# Altium PCB LittleRC.PcbDoc
Units mil, origin at the board's own origin, x right, y up, seen from the top; angles counter-clockwise.
Board outline 1496.06 x 1811.02 mil, 2 copper layers (Top Layer, Bottom Layer); 39 components, 41 nets, 169 pads, 190 vias.
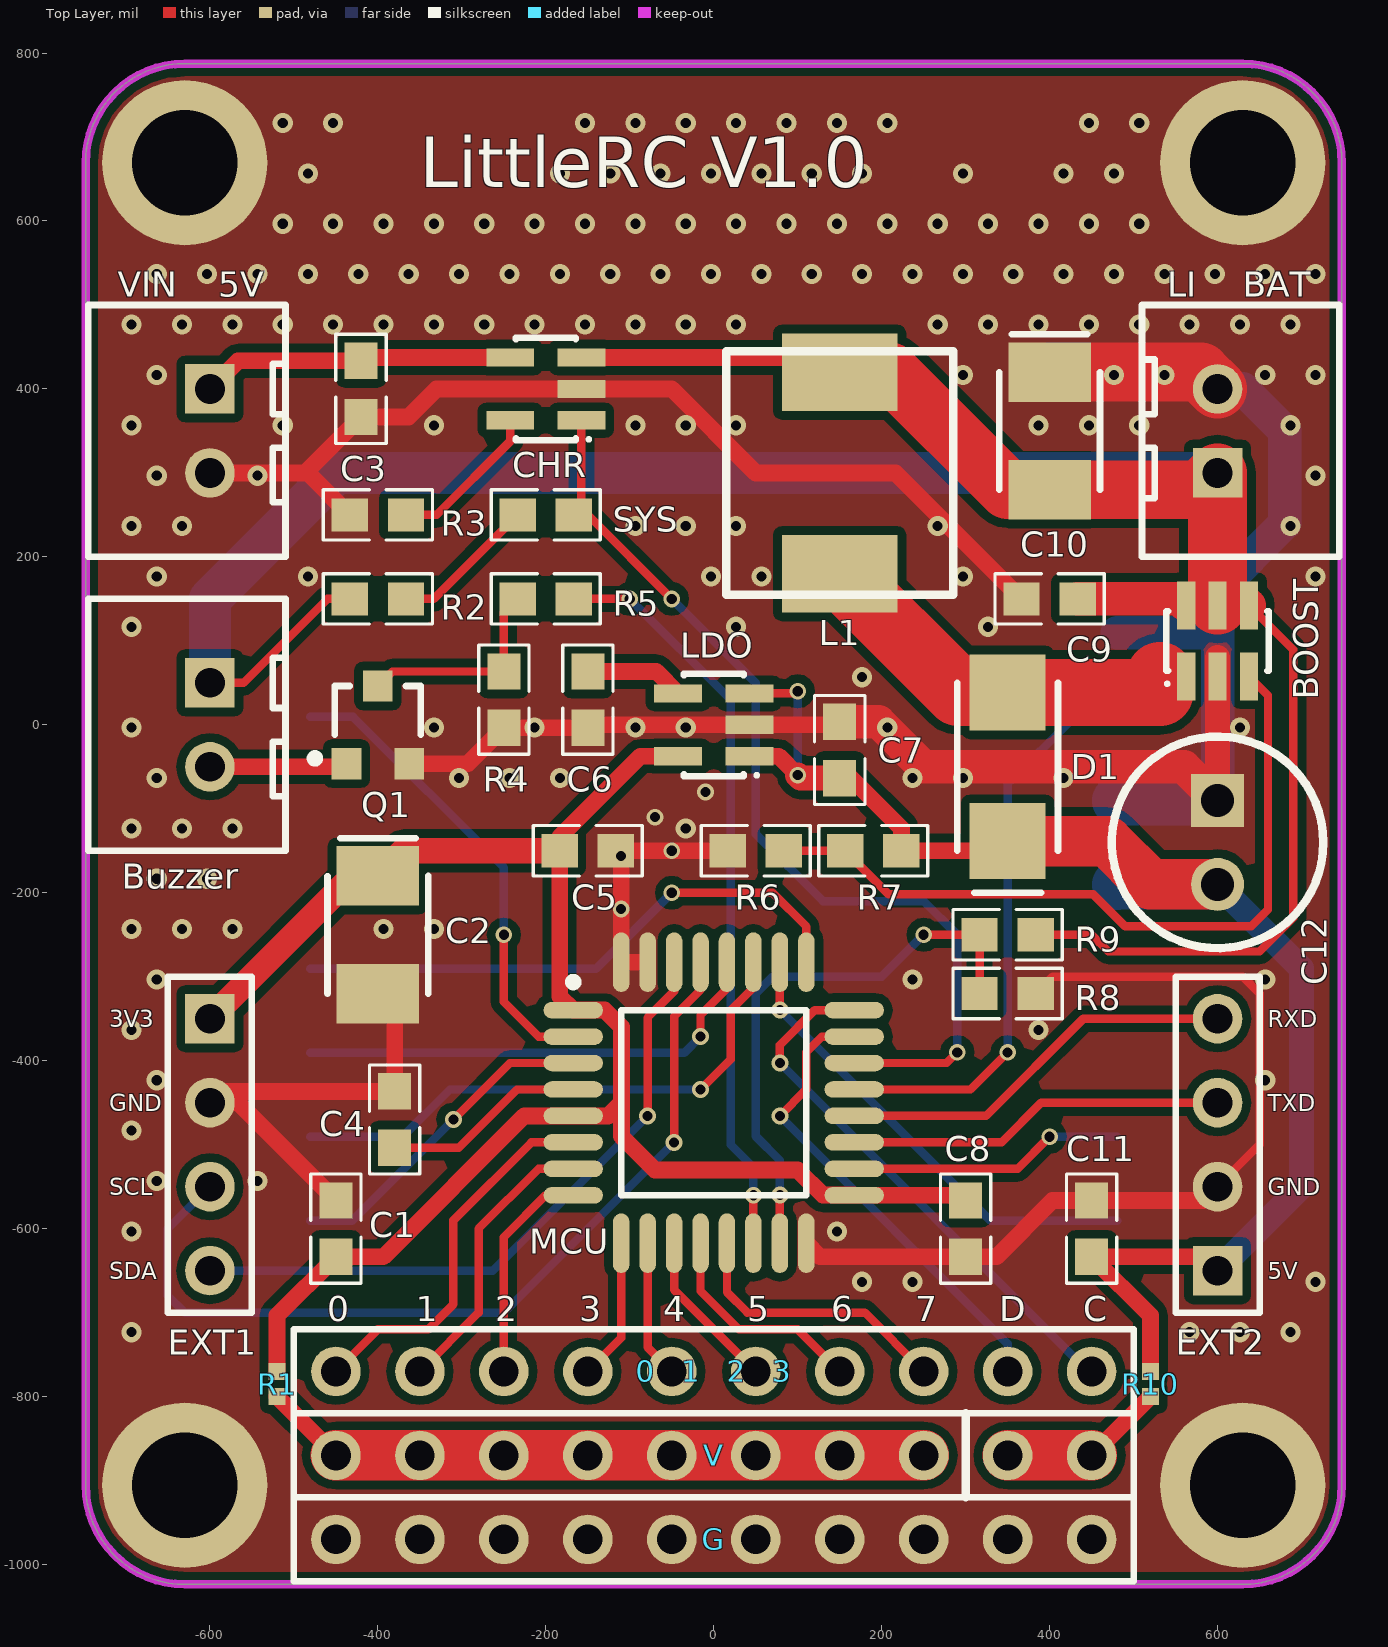
[diagram p0: Top Layer view]
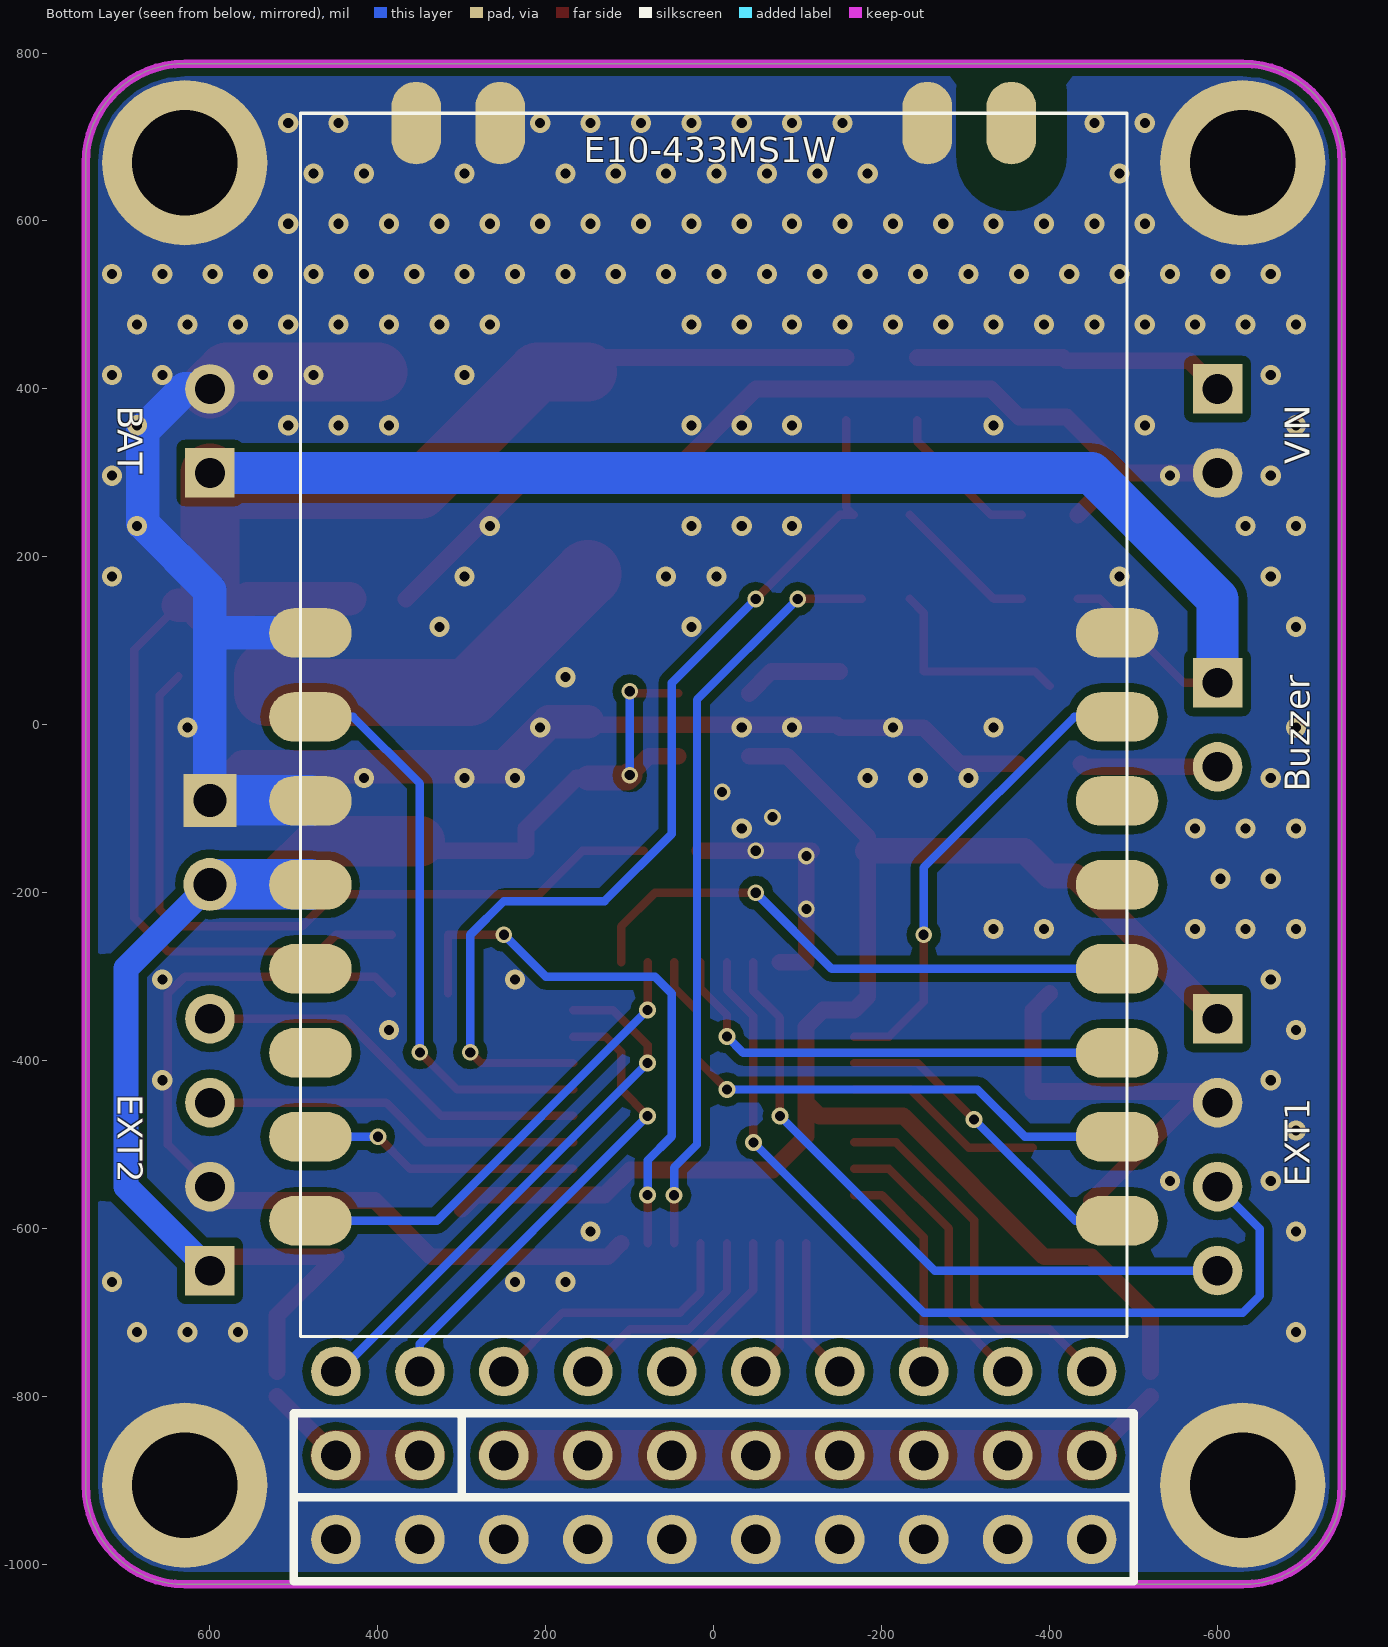
[diagram p1: Bottom Layer view, seen from below]

## Layer stack, top to bottom
Top Solder: solder mask 0.4, Solder Resist, Dk 3.5
Top Layer: signal copper 1.4
Dielectric1: dielectric 12.6, FR-4, Dk 4.8
Bottom Layer: signal copper 1.4
Bottom Solder: solder mask 0.4, Solder Resist, Dk 3.5

## Board outline
-748.03,-905.51 ccw(c-629.92,-905.51) -629.92,-1023.62 629.92,-1023.62 ccw(c629.92,-905.51) 748.03,-905.51 748.03,669.29 ccw(c629.92,669.29) 629.92,787.4 -629.92,787.4 ccw(c-629.92,669.29) -748.03,669.29

## Design rules (kind name [scope] priority, off if disabled: settings)
Clearance [All] p1: gap=10 ignorepadtopadclearanceinfootprint=FALSE
ComponentClearance [All] p1: gap=0 collisioncheckmode=3 verticalgap=0 showdistances=FALSE
PlaneConnect [All] p1: planeconnectstyle=Direct reliefexpansion=20 reliefentries=4 reliefconductorwidth=10 reliefairgap=10
PolygonConnect [All] p1: connectstyle=Direct reliefconductorwidth=100 reliefentries=4 polygonreliefangle="90 Angle" airgapwidth=10
RoutingVias [All] p1: holewidth=28 width=50 viastyle="Through Hole" minholewidth=12 minwidth=20 maxholewidth=28 maxwidth=50
SolderMaskExpansion [All] p1: expansion=4
Width [All] p1: maxlimit=100 minlimit=10 preferedwidth=10 minimp=50.000000 maximp=50.000000 favimp=50.000000
28 further rules are at their usual default settings.

## Components (designator, comment, footprint, x,y, rotation, side; value= is the part's Value field where it differs from the comment)
"0   1   2   3" "Header 10" HDR1X10 -450,-770 r0 top (schematic designator IO)
BAT "Battery" HDR2X1_B1 600,400 r270 top
BOOST "SX1308" SOT23-6 600,100 r0 top
Buzzer "Header 2" HDR2X1_B1 -600,-50 r90 top
C1 "Cap" 0603-1 -450,-600 r90 top value=0.1uf (schematic designator C33)
C2 "Cap" CAP-3528 -400,-250 r270 top value=0.1uf (schematic designator C345)
C3 "Cap" 0603-1 -420,400 r90 top value=10uF (schematic designator C8)
C4 "Cap" 0603-1 -380,-470 r90 top value=0.1uf (schematic designator C1)
C5 "Cap" 0603-1 -150,-150 r180 top value=0.1uf (schematic designator C2)
C6 "Cap" 0603-1 -150,30 r90 top value=103 (schematic designator C3)
C7 "Cap" 0603-1 150,-30 r270 top value=10uF (schematic designator C6)
C8 "Cap" 0603-1 300,-600 r90 top value=104 (schematic designator C4)
C9 "Cap" 0603-1 400,150 r0 top value=10uF (schematic designator C91)
C10 "Cap" CAP-3528 400,350 r270 top value=10uF (schematic designator C123)
C11 "Cap" 0603-1 450,-600 r90 top value=0.1uf (schematic designator C34)
C12 "Cap" RB.1/.2-F 600,-140 r90 top value=10uF (schematic designator C9)
CHR "LTC4054" SOT23-5 -200,400 r90 top
D1 "D-Schottky" DIODE-SMA 350,-50 r270 top
E10-433MS1W "SPI-E10433MS1W" SPI-E10433MS1W 0,0 r90 bottom locked
EXT1 "Header 4" HDR1X4 -600,-350 r270 top
EXT2 "Header 4" HDR1X4 600,-650 r90 top
G "Header 10" HDR1X10 -450,-970 r0 top (schematic designator GND)
L1 "Inductor" 0630 150,300 r270 top value=10uH
LDO "SPX3819" SOT23-5 0,0 r90 top
MCU "STM32F030K6Tx" LQFP-32 0,-450 r0 top
Q1 "S8050" SOT-23 -400,0 r0 top
R1 "Res1" jumper -520,-785 r90 top value=0 (schematic designator R3V3)
R2 "Res1" 0603-1 -400,150 r0 top value=1K
R3 "Res1" 0603-1 -400,250 r180 top value=1K2 (schematic designator R22)
R4 "Res1" 0603-1 -250,30 r270 top value=1K
R5 "Res1" 0603-1 -200,150 r0 top value=1K (schematic designator R3)
R6 "Res1" 0603-1 50,-150 r0 top value=10K (schematic designator R12)
R7 "Res1" 0603-1 190,-150 r0 top value=10K (schematic designator R11)
R8 "Res1" 0603-1 350,-320 r0 top value=10K (schematic designator R7)
R9 "Res1" 0603-1 350,-250 r180 top value=10K (schematic designator R5)
R10 "Res1" jumper 520,-785 r90 top value=0 (schematic designator R5V)
SYS "LED0" 0603-1 -200,250 r0 top
V "Header 10" HDR1X10 -450,-870 r0 top (schematic designator VCC)
VIN "Header 2" HDR2X1_B1 -600,300 r90 top

## Footprints (in the part's own frame and the unit in brackets; to place one, negate y for a bottom-side part, rotate by r counter-clockwise, add the part's x,y. Pads: shape width x height; smd on the part's side, far side on the other; paste and mask are expansions set on the pad)
0603-1 [mm] "贴片带丝印"
  rect 1.1x1 smd: 1(-0.85,0) 2(0.85,0)
  silkscreen extent -1.65,-0.76 1.65,0.76, body extent -1.14,-0.38 1.14,0.38, height 1
0630 [mm]
  rect 2.35x3.5 smd: 1(-3.048,0) 2(3.048,0)
  silkscreen extent -3.68,-3.43 3.68,3.43
CAP-3528 [mm] "钽电容"
  rect 1.8x2.5 smd: 1(-1.778,0) 2(1.778,0)
  silkscreen extent -2.92,-1.52 1.78,1.52, body extent -1.91,-1.4 1.91,1.4, height 1.1
DIODE-SMA [mm] "贴片二极管"
  rect 2.3x2.3 smd: 1(-2.25,0) 2(2.25,0)
  silkscreen extent -2.54,-1.52 3.81,1.52, body extent -2.92,-1.4 2.92,1.4, height 3
HDR1X4 [mm] "Connector; Header; 4 Position"
  rect 1.5x1.5 hole 0.9: 1(0,0)
  round 1.5 hole 0.9: 2(2.54,0) 3(5.08,0) 4(7.62,0)
  silkscreen extent -1.27,-1.27 8.89,1.27
HDR1X10 [mm] "Connector; Header; 10 Position"
  round 1.5 hole 0.9: 1(0,0) 2(2.54,0) 3(5.08,0) 4(7.62,0) 5(10.16,0) 6(12.7,0) 7(15.24,0) 8(17.78,0) 9(20.32,0) 10(22.86,0)
  silkscreen extent -1.27,-1.27 24.13,1.27
HDR2X1_B1 [mm] "Connector; Header; 4 Position"
  round 1.5 hole 0.9: 1(0,0)
  rect 1.5x1.5 hole 0.9: 2(2.54,0)
  silkscreen extent -2.54,-2.29 5.08,3.68, body extent -2.41,-2.16 5.08,3.56, height 1.5
jumper [mil]
  rect 20x20 smd: 1(-15,0) 2(15,0)
LQFP-32 [mm] "LQFP"
  oval 1.8x0.5 smd: 1(-4.25,2.8) 2(-4.25,2) 3(-4.25,1.2) 4(-4.25,0.4) 5(-4.25,-0.4) 6(-4.25,-1.2) 7(-4.25,-2) 8(-4.25,-2.8) 17(4.25,-2.8) 18(4.25,-2) 19(4.25,-1.2) 20(4.25,-0.4) 21(4.25,0.4) 22(4.25,1.2) 23(4.25,2) 24(4.25,2.8)
  oval 0.5x1.8 smd: 9(-2.8,-4.25) 10(-2,-4.25) 11(-1.2,-4.25) 12(-0.4,-4.25) 13(0.4,-4.25) 14(1.2,-4.25) 15(2,-4.25) 16(2.8,-4.25) 25(2.8,4.25) 26(2,4.25) 27(1.2,4.25) 28(0.4,4.25) 29(-0.4,4.25) 30(-1.2,4.25) 31(-2,4.25) 32(-2.8,4.25)
  silkscreen extent -4.37,-2.79 2.79,3.77, body extent -3.5,-3.5 3.5,3.5, height 1.6
RB.1/.2-F [mm]
  rect 1.6x1.6 hole 1: 1(1.27,0)
  round 1.6 hole 1: 2(-1.27,0)
  silkscreen extent -3.2,-3.2 3.2,3.2
SOT23-5 [mm] "SOT-23/SC-74A; 5 Leads; Body 3.1 x 3 mm, inc. leads (LxW max)"
  rect 0.55x1.45 smd: 1(-0.95,-1.075) 2(0,-1.075) 3(0.95,-1.075) 4(0.95,1.075) 5(-0.95,1.075)
  silkscreen extent -1.57,-1.35 1.55,0.9
SOT23-6 [mm] "SOT-23/SC-74A; 5 Leads; Body 3.1 x 3 mm, inc. leads (LxW max)"
  rect 0.55x1.45 smd: 1(-0.95,-1.075) 2(0,-1.075) 3(0.95,-1.075) 4(0.95,1.075) 5(0,1.075) 6(-0.95,1.075)
  silkscreen extent -1.57,-1.35 1.55,0.9
SOT-23 [mm]
  rect 0.9x0.95 smd: 1(-0.95,-1.175) 2(0.95,-1.175) 3(0,1.175)
  silkscreen extent -2.03,-1.14 1.3,1.18
SPI-E10433MS1W [mm]
  oval 1.5x2.5 smd: 1(2.78,-12.2) 2(0.24,-12.2) 3(-2.3,-12.2) 4(-4.84,-12.2) 5(-7.38,-12.2) 6(-9.92,-12.2) 7(-12.46,-12.2) 8(-15,-12.2) 9(-15,12.2) 10(-12.46,12.2) 11(-9.92,12.2) 12(-7.38,12.2) 13(-4.84,12.2) 14(-2.3,12.2) 15(0.24,12.2) 16(2.78,12.2)
  oval 2.5x1.5 smd: 17(18.2,9) 18(18.2,6.46) 19(18.2,-6.46) 20(18.2,-9)
  silkscreen extent -18.5,-12.5 18.5,12.5

## Part data
"0   1   2   3" G V: "Header, 10-Pin", LatestRevisionDate=17-Jul-2002, LatestRevisionNote="Re-released for DXP Platform.", Publisher="Altium Limited"
BAT: "Multicell Battery", LatestRevisionDate=17-Jul-2002, LatestRevisionNote="Re-released for DXP Platform.", PackageDescription="Battery; 2 Leads", PackageReference=BAT-2, Published=24-Mar-1999, Publisher="Altium Limited"
Buzzer VIN: "接插件", LatestRevisionDate=17-Jul-2002, LatestRevisionNote="Re-released for DXP Platform.", Publisher="Altium Limited"
C1 C2 C3 C4 C5 C6 C7 C8 C9 C10 C11 C12: "Capacitor", LatestRevisionDate=17-Jul-2002, LatestRevisionNote="Re-released for DXP Platform.", PackageDescription="Radial Cap, Thru-Hole; 2 Leads; 0.3 in Pin Spacing", PackageReference=RAD-0.3, Published=8-Jun-2000, Publisher="Altium Limited"
D1: "肖特基二极管", Code_JEDEC=DO-214-AA, LatestRevisionDate=17-Jul-2002, LatestRevisionNote="Re-released for DXP Platform.", PackageReference=SMB, Published=8-Jun-2000, Publisher="Altium Limited", Type=SS14
EXT1 EXT2: "Header, 4-Pin", LatestRevisionDate=17-Jul-2002, LatestRevisionNote="Re-released for DXP Platform.", Publisher="Altium Limited"
L1: "电感", Code_IEC=1005, Code_JEITA=0402, LatestRevisionDate=17-Jul-2002, LatestRevisionNote="Re-released for DXP Platform.", PackageReference=0402-A, Published=8-Jun-2000, Publisher="Altium Limited"
Q1: "NPN三极管", PackageDocument=Sep-1998, Code_JEDEC=TO-92A, ComponentLink1Description="Manufacturer Link", ComponentLink1URL=http://www.fairchildsemi.com/, ComponentLink2Description=Datasheet, ComponentLink2URL=http://www.fairchildsemi.com/ds/2N%2F2N3904.pdf, DatasheetDocument=1997, LatestRevisionDate=15-Jan-2003, LatestRevisionNote="PCB Footprint 'BCY-W3/D4.7' replaced", PackageReference=TO-92A, Published=8-Jun-2000, Publisher="Altium Limited"
R1 R2 R3 R4 R5 R6 R7 R8 R9 R10: "Resistor", LatestRevisionDate=17-Jul-2002, LatestRevisionNote="Re-released for DXP Platform.", PackageDescription="Axial Device, Thru-Hole; 2 Leads; 0.3 in Pin Spacing", PackageReference=AXIAL-0.3, Published=8-Jun-2000, Publisher="Altium Limited"
SYS: "Typical INFRARED GaAs LED", LatestRevisionDate=08-Jul-2005, LatestRevisionNote="Mech Layer 1 removed.", PackageDescription="LED; 2 Leads", PackageReference=LED-0, Published=8-Jun-2000, Publisher="Altium Limited"

## Free pads (board coordinates)
  round 196.85 hole 125.98: 1(-629.92,669.29) 2(-629.92,-905.51) 3(629.92,-905.51) 4(629.92,669.29)

## Via types
v1: diameter 24, hole 12, Top Layer to Bottom Layer, tented both sides, 165 vias
v2: diameter 20, hole 12, Top Layer to Bottom Layer, tented both sides, 25 vias

## Nets (pads, with @x,y where several pads share a name; then routed paths per layer and width w, separated by ;. In a path a pad name is that pad's centre, name@x,y a point inside that pad or via, vN(x,y) a via of type N, cw(c..) or ccw(c..) an arc to the next point about the centre after c; other vN are vias at no path point)
+3.3: C1.1 C2.1 C5.2 C8.2 EXT1.1 LDO.5 MCU.1 MCU.5 MCU.17 R1.2 | length 2116.4
  Top Layer w20: R1.2 -520,-703.46 C1.1 -393.46,-633.46 -225.75,-465.75 MCU.5 -125.75,-465.75 -110,-450 ; LDO.5 -87.4,-37.4 -183.46,-133.46 C5.2 -183.46,-323.62 MCU.1 -130.24,-339.76 -110,-360 -110,-450 ; C8.2@300,-576.54 283.7,-560.24 MCU.17 167.09,-560 130,-560 100,-530 -70,-530 -110,-490 -110,-450
  Top Layer w30: EXT1.1 -430,-180 C2.1 -370,-150 C5.2
+5: C7.2 C11.1 C12.2 D1.2 E10-433MS1W.13 EXT2.1 LDO.1 LDO.3 R7.2 R10.2 | length 1789.8
  Top Layer w10: LDO.3 97.4,37.4 v2(100,40)
  Top Layer w20: LDO.1 77.4,-37.4 v2(100,-60) ; C7.2 163.46,-63.46 223.46,-123.46 R7.2 338.58,-150 D1.2 ; R10.2 520,-703.46 C11.1 583.46,-633.46 EXT2.1
  Top Layer w30: v2(100,-60) 103.46,-63.46 C7.2
  Top Layer w60: D1.2 468.58,-138.58 520,-190 C12.2
  Bottom Layer w10: v2(100,-60) v2(100,40)
  Bottom Layer w30: EXT2.1 700,-550 700,-290 C12.2
  Bottom Layer w60: E10-433MS1W.13 480.87,-190 C12.2
ADC_BAT: MCU.15 R8.1 R9.2 | length 674.8
  Top Layer w10: MCU.15 v2(78.74,-560) ; v2(250,-250) R9.2 R8.1
  Bottom Layer w10: v2(78.74,-560) 78.74,-518.74 50,-490 50,-320 70,-300 200,-300 v2(250,-250)
ADC_IN0: "0   1   2   3.1" MCU.6 | length 454.2
  Top Layer w10: -450,-770 -400,-720 -340,-720 -310,-690 -310,-590 -217.24,-497.24 MCU.6
ADC_IN1: "0   1   2   3.2" MCU.7 | length 341.2
  Top Layer w10: -350,-770 -280,-700 -280,-600 -208.74,-528.74 MCU.7
ADC_IN2: "0   1   2   3.3" MCU.8 | length 263.3
  Top Layer w10: -250,-770 -250,-610 -200.24,-560.24 MCU.8
ADC_IN3: "0   1   2   3.4" MCU.9 | length 169.1
  Top Layer w10: -150,-770 -110.24,-730.24 MCU.9
ADC_IN4: "0   1   2   3.5" MCU.10 | length 164.6
  Top Layer w10: MCU.10 -78.74,-741.26 -50,-770
ADC_IN5: "0   1   2   3.6" MCU.11 | length 193
  Top Layer w10: MCU.11 -47.24,-672.76 50,-770
ADC_IN6: "0   1   2   3.7" MCU.12 | length 262.3
  Top Layer w10: MCU.12 -15.75,-674.25 30,-720 100,-720 150,-770
ADC_IN7: "0   1   2   3.8" MCU.13 | length 331.7
  Top Layer w10: MCU.13 15.75,-675.75 40,-700 180,-700 250,-770
ANT: E10-433MS1W.20
CHRG: CHR.1 MCU.22 SYS.2 | length 1153.3
  Top Layer w10: CHR.1 -157.68,258.86 SYS.2 -150,250 v2(-50,150) ; MCU.22 277.24,-402.76 v2(290,-390)
  Bottom Layer w10: v2(-50,150) 50,50 50,-130 130,-210 250,-210 290,-250 v2(290,-390)
GND: BAT.1 BOOST.2 C1.2 C2.2 C3.1 C4.2 C5.1 C6.1 C7.1 C8.1 C9.1 C10.1 C11.2 C12.1 CHR.2 E10-433MS1W.1 E10-433MS1W.14 E10-433MS1W.16 E10-433MS1W.17 E10-433MS1W.18 E10-433MS1W.19 EXT1.2 EXT2.2 G.1 G.2 G.3 G.4 G.5 G.6 G.7 G.8 G.9 G.10 LDO.2 MCU.16 MCU.31 MCU.32 pad.1 pad.2 pad.3 pad.4 Q1.2 R3.2 R4.2 R6.1 R8.2 VIN.1 | length 5312.5
  Top Layer w10: R8.2 403.46,-300 630,-300 650,-320 650,-500 EXT2.2
  Top Layer w20: VIN.1 -486.54,300 ; C1.2 -566.54,-450 EXT1.2 -586.54,-436.54 C4.2 -380,-340 C2.2 ; R3.2 -483.46,300 -486.54,300 ; Q1.2 -292.8,-46.26 R4.2 C6.1 -146.53,0 LDO.2 146.54,0 C7.1 ; MCU.31 MCU.32 v2(-110.24,-219.49) v2(-110.24,-156.3) C5.1 v2(-50,-150) R6.1 ; MCU.16 126.38,-633.46 C8.1 336.54,-633.46 403.46,-566.54 C11.2 583.46,-566.54 EXT2.2 ; C9.1 216.54,300 50,300 -50,400 CHR.2 -330,400 -363.46,366.54 C3.1 -486.54,300
  Top Layer w30: C12.1 BOOST.2 BOOST.2@600,80
  Top Layer w40: C7.1 196.54,3.46 250,-50 560,-50 C12.1
  Top Layer w70: C10.1 580,420 BAT.1
  Bottom Layer w40: E10-433MS1W.16 599.45,109.45 600,110 ; C12.1 600,110 ; BAT.1 630,400 680,350 680,240 600,160 600,110
  Bottom Layer w60: E10-433MS1W.14 480.87,-90 C12.1
  other v1: -693.31,-723.31 566.69,-723.31 626.69,-723.31 686.69,-723.31 176.69,-663.31 236.69,-663.31 716.69,-663.31 -693.31,-603.31 146.69,-603.31 -663.31,-543.31 -543.31,-543.31 -693.31,-483.31 -663.31,-423.31 656.69,-423.31 -693.31,-363.31 386.69,-363.31 -663.31,-303.31 236.69,-303.31 656.69,-303.31 -693.31,-243.31 -633.31,-243.31 -573.31,-243.31 -393.31,-243.31 -333.31,-243.31 -663.31,-183.31 -603.31,-183.31 -693.31,-123.31 -633.31,-123.31 -573.31,-123.31 -33.31,-123.31 -663.31,-63.31 -303.31,-63.31 -243.31,-63.31 -183.31,-63.31 236.69,-63.31 296.69,-63.31 416.69,-63.31 -693.31,-3.31 -333.31,-3.31 -213.31,-3.31 -93.31,-3.31 -33.31,-3.31 206.69,-3.31 626.69,-3.31 176.69,56.69 -693.31,116.69 26.69,116.69 326.69,116.69 -663.31,176.69 -483.31,176.69 -3.31,176.69 56.69,176.69 296.69,176.69 716.69,176.69 -693.31,236.69 -633.31,236.69 -93.31,236.69 -33.31,236.69 26.69,236.69 266.69,236.69 686.69,236.69 -663.31,296.69 -543.31,296.69 716.69,296.69 -693.31,356.69 -513.31,356.69 -333.31,356.69 -93.31,356.69 -33.31,356.69 26.69,356.69 386.69,356.69 446.69,356.69 506.69,356.69 686.69,356.69 -663.31,416.69 296.69,416.69 476.69,416.69 536.69,416.69 656.69,416.69 716.69,416.69 -693.31,476.69 -633.31,476.69 -573.31,476.69 -513.31,476.69 -453.31,476.69 -393.31,476.69 -333.31,476.69 -273.31,476.69 -213.31,476.69 -153.31,476.69 -93.31,476.69 -33.31,476.69 26.69,476.69 266.69,476.69 326.69,476.69 386.69,476.69 446.69,476.69 506.69,476.69 566.69,476.69 626.69,476.69 686.69,476.69 -663.31,536.69 -603.31,536.69 -543.31,536.69 -483.31,536.69 -423.31,536.69 -363.31,536.69 -303.31,536.69 -243.31,536.69 -183.31,536.69 -123.31,536.69 -63.31,536.69 -3.31,536.69 56.69,536.69 116.69,536.69 176.69,536.69 236.69,536.69 296.69,536.69 356.69,536.69 416.69,536.69 476.69,536.69 536.69,536.69 596.69,536.69 656.69,536.69 716.69,536.69 -513.31,596.69 -453.31,596.69 -393.31,596.69 -333.31,596.69 -273.31,596.69 -213.31,596.69 -153.31,596.69 -93.31,596.69 -33.31,596.69 26.69,596.69 86.69,596.69 146.69,596.69 206.69,596.69 266.69,596.69 326.69,596.69 386.69,596.69 446.69,596.69 506.69,596.69 -483.31,656.69 -183.31,656.69 -123.31,656.69 -63.31,656.69 -3.31,656.69 56.69,656.69 116.69,656.69 176.69,656.69 296.69,656.69 416.69,656.69 476.69,656.69 -513.31,716.69 -453.31,716.69 -153.31,716.69 -93.31,716.69 -33.31,716.69 26.69,716.69 86.69,716.69 146.69,716.69 206.69,716.69 446.69,716.69 506.69,716.69
  other v2: -70,-110 -10,-80
I2C1_SCL: EXT1.3 MCU.29 | length 1073.3
  Top Layer w10: v2(-47.24,-497.24) -47.24,-347.24 -15.75,-315.75 MCU.29
  Bottom Layer w10: EXT1.3 -650,-600 -650,-680 -630,-700 -250,-700 v2(-47.24,-497.24)
I2C1_SDA: EXT1.4 MCU.30 | length 793.7
  Top Layer w10: v2(-78.74,-465.75) -78.74,-348.74 -47.24,-317.24 MCU.30
  Bottom Layer w10: EXT1.4 -262.99,-650 v2(-78.74,-465.75)
NetBOOST_1: BOOST.1 D1.1 L1.2 | length 460
  Top Layer w80: L1.2 291.42,38.58 D1.1 531.42,38.58 531.42,58.58
NetBOOST_3: BOOST.3 R6.2 R7.1 | length 909.1
  Top Layer w10: R6.2 R7.1 208.27,-201.73 451.73,-201.73 490,-240 640,-240 660,-220 660,35.08 BOOST.3
NetBuzzer_2: Buzzer.1 Q1.1 | length 164.1
  Top Layer w20: Buzzer.1 -441.14,-50 Q1.1
NetC4_1: C4.1 MCU.4 | length 241.3
  Top Layer w10: C4.1 -303.46,-503.46 -234.25,-434.25 MCU.4
NetC6_2: C6.2 LDO.4 | length 118.5
  Top Layer w20: C6.2 -68.39,63.46 LDO.4
NetCHR_5: CHR.5 R3.1 | length 185.5
  Top Layer w10: R3.1 -330,250 -242.32,337.68 CHR.5
NetQ1_2: Q1.3 R4.1 R5.1 | length 250.5
  Top Layer w10: Q1.3 -382.8,63.46 R4.1 -250,133.46 R5.1
NetR1_1: R1.1 V.1 V.2 V.3 V.4 V.5 V.6 V.7 V.8 | length 799
  Top Layer w20: R1.1 V.1
  Top Layer w60: V.1 V.2 V.3 V.4 V.5 V.6 V.7 V.8
NetR2_2: R2.2 SYS.1 | length 174.5
  Top Layer w10: R2.2 -333.46,150 SYS.1
NetR10_1: R10.1 V.9 V.10 | length 199
  Top Layer w20: V.10 R10.1
  Top Layer w60: V.9 V.10
PA_EN: E10-433MS1W.15 MCU.21 | length 684.2
  Top Layer w10: MCU.21 305.75,-434.25 v2(350,-390)
  Bottom Layer w10: v2(350,-390) 350,-70 429.45,9.45 E10-433MS1W.15
PWM_OUT: MCU.14 R5.2 | length 904.8
  Top Layer w10: R5.2@-176.54,150 R5.2 v2(-100,150) ; MCU.14 v2(47.24,-560.24)
  Bottom Layer w10: v2(-100,150) 20,30 20,-500 47.24,-527.24 v2(47.24,-560.24)
RF_EN: E10-433MS1W.8 MCU.3 | length 390.8
  Top Layer w10: v2(-310,-470) -242.76,-402.76 MCU.3
  Bottom Layer w10: E10-433MS1W.8 -430.55,-590.55 v2(-310,-470)
SPI1_IRQ: E10-433MS1W.10 MCU.18 | length 328.8
  Top Layer w10: MCU.18 361.81,-528.74 v2(400,-490.55)
  Bottom Layer w10: v2(400,-490.55) E10-433MS1W.10
SPI1_MISO: E10-433MS1W.7 MCU.27 | length 665.6
  Top Layer w10: v2(-15.75,-434.25) 20,-398.5 20,-340 47.24,-312.76 MCU.27
  Bottom Layer w10: E10-433MS1W.7 -370.55,-490.55 -314.25,-434.25 v2(-15.75,-434.25)
SPI1_MOSI: E10-433MS1W.6 MCU.28 | length 574.2
  Top Layer w10: v2(-15.75,-371.26) -15.75,-345.75 15.75,-314.25 MCU.28
  Bottom Layer w10: E10-433MS1W.6 -35.04,-390.55 v2(-15.75,-371.26)
SPI1_NSS: E10-433MS1W.5 MCU.25 | length 687.2
  Top Layer w10: v2(-50,-200) 70,-200 110.24,-240.24 MCU.25
  Bottom Layer w10: E10-433MS1W.5 -140.55,-290.55 v2(-50,-200)
SPI1_SCK: E10-433MS1W.9 MCU.26 | length 562.5
  Top Layer w10: v2(78.74,-339.76) MCU.26
  Bottom Layer w10: v2(78.74,-339.76) 329.53,-590.55 E10-433MS1W.9
SYS_SWCLK: "0   1   2   3.10" MCU.24 | length 650.6
  Top Layer w10: v2(78.74,-402.76) 78.74,-381.26 120.24,-339.76 MCU.24
  Bottom Layer w10: v2(78.74,-402.76) 445.98,-770 450,-770
SYS_SWDIO: "0   1   2   3.9" MCU.23 | length 570.4
  Top Layer w10: v2(78.74,-465.75) 110,-434.49 110,-390 128.74,-371.26 MCU.23
  Bottom Layer w10: v2(78.74,-465.75) 350,-737.01 350,-770
USART1_RX: EXT2.4 MCU.20 | length 480.6
  Top Layer w10: MCU.20 324.25,-465.75 440,-350 EXT2.4
USART1_TX: EXT2.3 MCU.19 | length 452.2
  Top Layer w10: MCU.19 342.76,-497.24 390,-450 EXT2.3
Vbat: BAT.2 BOOST.4 BOOST.5 BOOST.6 Buzzer.2 C9.2 C10.2 CHR.3 L1.1 R2.1 R9.1 | length 3491.5
  Top Layer w10: Buzzer.2 -560,50 -460,150 R2.1 ; R9.1 450,-250 470,-270 650,-270 690,-230 690,89.72 BOOST.4
  Top Layer w20: CHR.3 132.6,437.4 L1.1
  Top Layer w40: C9.2 554.92,150 BOOST.6 BOOST.5 BOOST.4
  Top Layer w70: L1.1 210,420 350,280 C10.2 580,280 BAT.2 BOOST.5
  Bottom Layer w50: Buzzer.2 -600,150 -450,300 BAT.2
VCC: C3.2 CHR.4 VIN.2 | length 373.2
  Top Layer w20: VIN.2 -566.54,433.46 C3.2 -416.06,437.4 CHR.4
WL_EN: E10-433MS1W.2 MCU.2 | length 564.4
  Top Layer w10: v2(-250,-250) -250,-330 -208.74,-371.26 MCU.2
  Bottom Layer w10: E10-433MS1W.2 -429.45,9.45 -250,-170 v2(-250,-250)
pads on no net: E10-433MS1W.3 E10-433MS1W.4 E10-433MS1W.11 E10-433MS1W.12

## Polygon pours and split planes (outlines as drawn)
GND on Top Layer "Top Layer-No Net" (solid, remove dead copper, pour order 0): -750,800 750,800 750,-1050 -750,-1050
GND on Bottom Layer "Top Layer-No Net" (solid, remove dead copper, pour order 26): 750,800 -750,800 -750,-1050 750,-1050

## Keep-outs
Keep-Out Layer:
  the board outline again, w10

## Silkscreen, mask and mechanical layers (free items; w line width, h text height)
Top Overlay:
  lines w10: 300,-920 300,-820
  text "LittleRC V1.0" at -350,640 h60
  text "5V" at -590,510 h30
  text "LI" at 540,510 h30
  text "3V3" at -720,-360 h20
  text "RXD" at 660,-360 h20
  text "GND" at -720,-460 h20
  text "TXD" at 660,-460 h20
  text "SCL" at -720,-560 h20
  text "GND" at 660,-560 h20
  text "SDA" at -720,-660 h20
  text "5V" at 660,-660 h20
  text "0" at -460,-710 h30
  text "1" at -355,-710 h30
  text "2" at -260,-710 h30
  text "3" at -160,-710 h30
  text "4" at -60,-710 h30
  text "5" at 40,-710 h30
  text "6" at 140,-710 h30
  text "7" at 240,-710 h30
  text "D" at 340,-710 h30
  text "C" at 440,-710 h30
Bottom Overlay:
  lines w10: -500,-920 500,-920 ; 300,-920 300,-820 ; -500,-1020 -500,-820 500,-820 500,-1020 -500,-1020
  text "BAT" at 710,380 h30 r90
  text "VIN" at -710,310 h30 r270
  text "Buzzer" at -710,-80 h30 r270
  text "EXT2" at 710,-440 h30 r90
  text "EXT1" at -710,-550 h30 r270